# Altium PCB thymio2-main.PcbDoc (part 3 of 4)
Units mm, origin at the board's own origin, x right, y up, seen from the top; angles counter-clockwise.
Board outline 107 x 105.75 mm, 2 copper layers (Top Layer, Bottom Layer), stack 1.591 mm thick; 334 components, 247 nets, 987 pads, 487 vias.
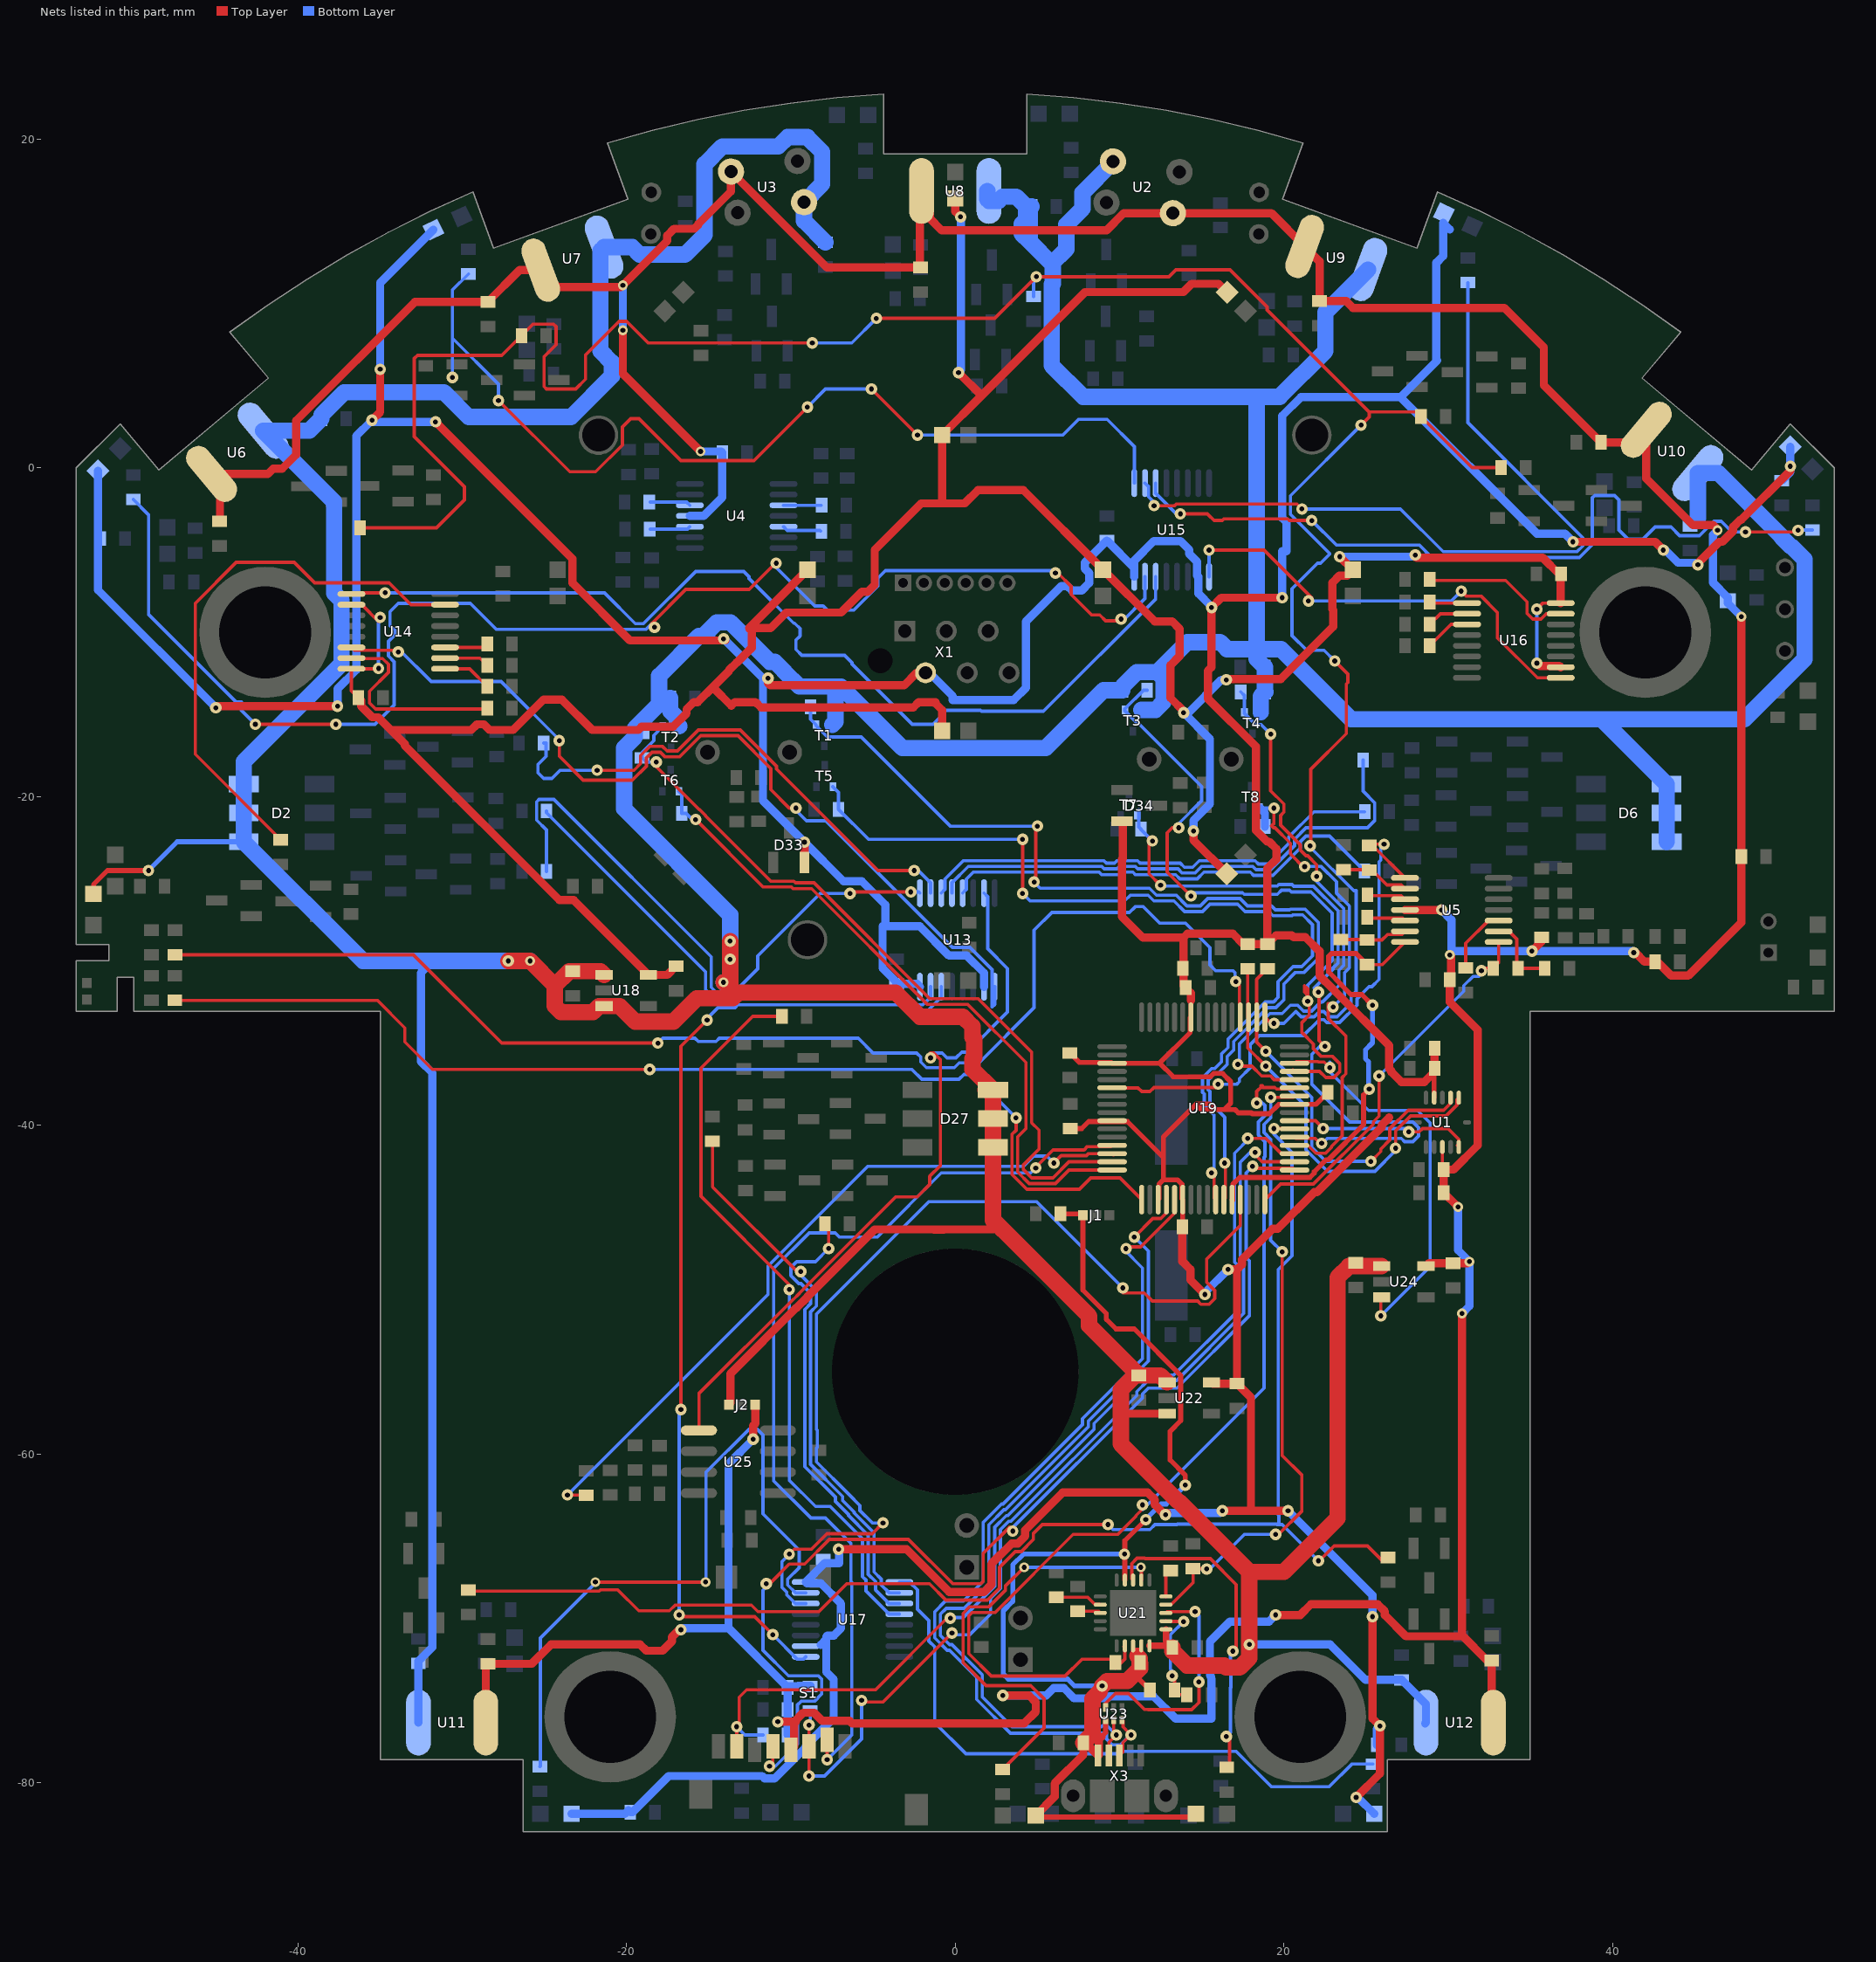
[diagram p3: the nets of this part, all layers, seen from the top]

## Via types
v1: diameter 0.7, hole 0.3, Top Layer to Bottom Layer, 458 vias
v2: diameter 0.6, hole 0.3, Top Layer to Bottom Layer, 25 vias
v3: diameter 0.66, hole 0.33, Top Layer to Bottom Layer, tented top, 4 vias

## Nets (pads, with @x,y where several pads share a name; then routed paths per layer and width w, separated by ;. In a path a pad name is that pad's centre, name@x,y a point inside that pad or via, vN(x,y) a via of type N, cw(c..) or ccw(c..) an arc to the next point about the centre after c; other vN are vias at no path point) (continued)
NetR11_1: R11.1 U5.1 U19.22 | length 32.5
  Top Layer w0.2: U19.22@9.55,-37.725 11.126,-37.725 11.351,-37.95 11.849,-37.95 12.099,-37.7 v1@16,-37.7 ; R11.1@25.2,-22.975 25.275,-22.9 v1(26.1,-22.9) ; R11.1@25.4,-22.975 U5.1@27.375,-24.95
  Bottom Layer w0.2: v1(16,-37.5) 17.15,-37.5 17.3,-37.35 17.3,-37.159 17.95,-36.509 17.95,-35.893 17.95,-35.106 18.506,-34.55 21.191,-34.55 22.166,-33.574 22.431,-33.574 22.606,-33.75 23.393,-33.75 24.45,-32.693 24.45,-32.307 25.182,-31.575 25.356,-31.575 25.8,-31.131 25.8,-23.971 25.9,-23.871 25.9,-23.1 v1(26.1,-22.9)
NetR11_2: R11.2 R25.2 U5.2 | length 4.2
  Top Layer w0.2: R25.2@23.625,-24.45 25.175,-24.45 R11.2@25.2,-24.475 25.375,-24.475 26.275,-25.375 27.15,-25.375 U5.2@27.375,-25.6
NetR17_2: R17.2 U4.3 | length 2.5
  Bottom Layer w0.2: R17.2@-18.55,-3.725 -16.301,-3.725 U4.3@-16.151,-3.575
NetR18_2: R18.2 U4.5 | length 2.5
  Bottom Layer w0.2: R18.2@-18.575,-2.075 -16.351,-2.075 U4.5@-16.151,-2.275
NetR19_2: R19.2 U4.10 | length 2.3
  Bottom Layer w0.2: U4.10@-10.451,-2.275 R19.2@-8.175,-2.275
NetR20_2: R20.2 U4.12 | length 2.4
  Bottom Layer w0.2: U4.12@-10.451,-3.575 -10.226,-3.8 -8.25,-3.8 R20.2@-8.2,-3.85
NetR26_2: R26.2 U5.3 | length 2.4
  Top Layer w0.2: R26.2@25.1,-25.975 25.15,-26.025 27.15,-26.025 U5.3@27.375,-26.25
NetR32_1: R32.1 R33.1 R34.1 R35.1 R41.2 U19.1 | length 151.3
  Top Layer w0.2: R41.2@-36.225,-3.65 -31.576,-3.65 -29.875,-1.949 -29.875,-1.146 -32.925,1.904 -32.925,6.654 -32.729,6.85 -27.6,6.85 R32.1@-26.4,8.05 -25.7,8.75 -24.446,8.75 -24.3,8.604 -24.3,7.496 -25.025,6.771 -25.025,4.946 -24.879,4.8 -23.1,4.8 -22.5,5.4 -22.5,6.878 -20.458,8.92 -20.002,8.92 -18.682,7.6 v1(-8.7,7.6) ; v1(-4.8,9.1) 2.4,9.1 v1(4.935,11.635) 13.007,11.635 13.427,12.055 16.725,12.055 18.985,9.795 18.985,9.615 25.2,3.4 ; U19.1@18.85,-33.425 19.225,-33.8 v1(19.4,-33.8) ; v1(21.6,-23) 21.6,-23.2 21.634,-23.234 21.634,-18.342 23.8,-16.176 23.8,-13.149 23.9,-13.049 23.9,-12.551 v1(23.1,-11.751) ; v1(24.7,2.6) 25.2,3.1 25.2,3.4 ; R35.1@33.225,0.025 31.45,0.025 R34.1@28.35,3.125 28.075,3.4 25.2,3.4
  Bottom Layer w0.2: v1(-8.7,7.6) -6.3,7.6 v1(-4.8,9.1) ; R33.1@4.775,10.425 4.775,11.475 v1(4.935,11.635) ; v1(19.4,-33.8) 20,-33.8 20.719,-33.081 20.735,-33.081 21.056,-33.402 21.843,-33.402 22.165,-33.081 22.432,-33.081 22.751,-33.4 23.248,-33.4 24.1,-32.548 24.1,-32.162 24.4,-31.862 24.4,-25.731 24.253,-25.731 21.6,-23.078 v1(21.6,-23) ; v1(23.1,-11.751) 22.449,-11.1 21.4,-11.1 20.503,-10.203 20.503,-7.349 22.051,-5.8 22.232,-5.8 22.8,-5.232 20.4,-2.832 20.4,-1.7 v1(24.7,2.6)
NetR42_1: R42.1 U5.7 U19.44 | length 28.3
  Top Layer w0.2: R42.1@25.075,-30.225 26,-30.225 U5.7@27.375,-28.85
  Top Layer w0.3: U19.44@16.9,-44.575 U19.44@16.85,-44.525 16.9,-44.475 16.9,-43.589 17.314,-43.175 21.586,-43.175 21.85,-42.911 21.85,-42.824 22.574,-42.1 22.714,-42.1 24.85,-39.964 24.85,-38.15 v1(25.2,-37.8) ; R42.1@25.075,-30.225 24.4,-29.55 22.901,-29.55 22.725,-29.726 22.725,-30.674 23.5,-31.449 23.5,-31.461 24.088,-32.05 24.75,-32.05 v1(25.4,-32.7)
  Bottom Layer w0.3: v1(25.2,-37.8) 25.15,-37.75 25.15,-36.141 24.964,-35.955 24.964,-35.417 25.4,-34.981 v1(25.4,-32.7)
NetR42_2: R42.2 R48.2 U5.6 | length 4.1
  Top Layer w0.2: R48.2@23.475,-28.7 25.05,-28.7 R42.2@25.075,-28.725 25.975,-28.725 26.3,-28.4 27.175,-28.4 U5.6@27.375,-28.2
NetR43_1: R43.1 U5.8 U19.48 | length 23.3
  Top Layer w0.2: U19.48@18.85,-44.525 19.8,-43.575 21.805,-43.575 25.45,-39.93 25.45,-39.792 25.8,-39.442 v1(25.8,-37) ; v1(32.025,-30.6) 32.175,-30.45 R43.1@32.75,-30.45 33.075,-30.125 U5.8@33.075,-28.85
  Bottom Layer w0.2: v1(25.8,-37) 30.95,-31.85 30.95,-31.506 31.506,-30.95 31.85,-30.95 32.025,-30.775 v1(32.025,-30.6)
NetR43_2: R43.2 R49.2 U5.9 | length 4.7
  Top Layer w0.2: U5.9@33.075,-28.2 33.701,-28.2 34.175,-28.674 34.175,-30.375 R43.2@34.25,-30.45 R49.2@35.875,-30.45
NetR46_2: R46.2 U5.5 | length 2.4
  Top Layer w0.2: R46.2@25.075,-27.35 25.125,-27.4 27.225,-27.4 U5.5@27.375,-27.55
NetR47_2: R47.2 U5.10 | length 4.1
  Top Layer w0.2: R47.2@31.075,-30.425 31.075,-28.924 32.449,-27.55 U5.10@33.075,-27.55
NetR52_1: R52.1 R53.1 U19.54 | length 89
  Top Layer w0.2: R52.1@-29.625,-68.275 -29.55,-68.35 -21.672,-68.35 -21.597,-68.275 -20.538,-68.275 -19.263,-69.55 -17.399,-69.55 -17.049,-69.2 -12.405,-69.2 -12.005,-69.6 -8.3,-69.6 -6.65,-67.95 ; -6.6,-67.9 -1.568,-67.9 -0.568,-68.9 1.968,-68.9 2.7,-68.168 2.7,-66.9 3.65,-65.95 4.018,-65.95 4.75,-65.218 4.75,-64.85 5.3,-64.3 v1(9.3,-64.3) ; v1(19.4,-40.2) 20.625,-40.2 U19.54@20.65,-40.225 ; v1(22.1,-66.5) 22.161,-66.5 23.061,-65.6 25.1,-65.6 26,-66.5 26.15,-66.5 R53.1@26.35,-66.3
  Bottom Layer w0.2: v1(9.3,-64.3) 9.6,-64.6 11.849,-64.6 12.149,-64.3 13.502,-64.3 13.526,-64.275 19.575,-64.275 19.6,-64.3 ; v1(19.4,-40.2) 19.4,-40.553 20.5,-41.654 20.5,-47.949 19.661,-48.788 19.661,-63.709 19.7,-63.749 19.7,-64.2 19.6,-64.3 ; v1(22.1,-66.5) 19.9,-64.3 19.6,-64.3
NetR56_1: R56.1 U14.15 | length 12.6
  Top Layer w0.2: U14.15@-36.75,-11.575 -36.725,-11.6 -34.851,-11.6 -34.5,-11.951 -34.5,-12.449 -35.65,-13.599 -35.65,-14.304 -35.279,-14.675 -28.525,-14.675 R56.1@-28.475,-14.625
NetR57_1: R57.1 U13.15 | length 30.2
  Bottom Layer w0.2: R57.1@-24.875,-20.875 -24.875,-20.986 -15.2,-30.661 -15.2,-31.756 -14.456,-32.5 -13.544,-32.5 -13.094,-32.05 -3.36,-32.05 -2.735,-32.675 -1.974,-32.675 -1.5,-32.201 U13.15@-1.5,-31.575
NetR58_1: R58.1 U14.1 | length 3
  Top Layer w0.2: U14.1@-31.05,-12.225 -29.55,-12.225 R58.1@-28.475,-13.3
NetR59_1: R59.1 U13.1 | length 37
  Top Layer w0.2: v1(-6.4,-25.9) -6.3,-25.8 v1(-2.7,-25.8)
  Bottom Layer w0.2: R59.1@-24.875,-24.55 -24.875,-22.029 -25.475,-21.429 -25.475,-20.321 -25.329,-20.175 -24.421,-20.175 -14.85,-29.746 -14.85,-31.611 -14.311,-32.15 -13.689,-32.15 -12.023,-30.484 -12.023,-29.694 -8.229,-25.9 v1(-6.4,-25.9) ; v1(-2.7,-25.8) -2.225,-25.8 U13.1@-2.15,-25.875
NetR60_1: R60.1 U14.2 | length 2.8
  Top Layer w0.2: U14.2@-31.05,-11.575 -28.925,-11.575 R60.1@-28.475,-12.025
NetR61_1: R61.1 U13.2 | length 32.5
  Top Layer w0.2: v1(-21.8,-18.4) -19.549,-18.4 -19.15,-18.001 -19.15,-17.506 -18.593,-16.95 -17.806,-16.95 -17.531,-17.226 -16.91,-17.226 -15.634,-15.95 -13.076,-15.95 -10.875,-18.151 -10.875,-18.325 -4.7,-24.5 v1(-2.5,-24.5)
  Bottom Layer w0.2: R61.1@-25.05,-16.75 -24.899,-16.75 -24.899,-17.55 -25.4,-18.051 -25.4,-18.549 -25.049,-18.9 -24.551,-18.9 -24.051,-18.4 v1(-21.8,-18.4) ; v1(-2.5,-24.5) -2.249,-24.5 -1.5,-25.249 U13.2@-1.5,-25.875
NetR62_1: R62.1 U14.3 | length 2.7
  Top Layer w0.2: U14.3@-31.05,-10.925 -28.675,-10.925 R62.1@-28.475,-10.725
NetR63_1: R63.1 U13.3 | length 29
  Bottom Layer w0.2: U13.3@-0.85,-25.875 -0.625,-25.65 -0.625,-25.024 0.499,-23.9 9.051,-23.9 9.201,-24.05 9.699,-24.05 9.849,-23.9 11.105,-23.9 11.255,-24.05 13.701,-24.05 13.951,-24.3 14.449,-24.3 14.849,-23.9 18.251,-23.9 18.451,-24.1 19.048,-24.1 20.3,-22.848 20.3,-22.461 21.836,-20.925 R63.1@24.925,-20.925
NetR64_1: R64.1 U13.4 | length 32.8
  Bottom Layer w0.2: U13.4@-0.2,-25.875 -0.2,-25.249 0.799,-24.25 8.906,-24.25 9.056,-24.4 9.843,-24.4 9.994,-24.25 10.96,-24.25 11.11,-24.4 13.556,-24.4 13.807,-24.65 14.593,-24.65 14.994,-24.25 18.106,-24.25 18.306,-24.45 19.193,-24.45 20.65,-22.993 20.65,-22.606 21.353,-21.904 25.1,-21.904 25.525,-21.479 25.525,-20.371 24.825,-19.671 R64.1@24.825,-17.775
NetR65_1: R65.1 U13.5 | length 28
  Bottom Layer w0.2: U13.5@0.45,-25.875 0.675,-25.65 0.675,-25.024 1.099,-24.6 8.762,-24.6 8.912,-24.75 9.988,-24.75 10.138,-24.6 10.815,-24.6 10.965,-24.75 13.412,-24.75 13.662,-25 14.738,-25 15.138,-24.6 17.962,-24.6 18.161,-24.8 19.338,-24.8 21,-23.138 21,-22.751 21.351,-22.4 22.775,-22.4 R65.1@24.9,-24.525
NetR74_1: R74.1 U15.15 | length 88
  Top Layer w0.2: v1(-42.6,-15.6) v1(-37.7,-15.6) ; v1(-18.3,-9.7) -18.3,-9.65 -18.475,-9.475 -16.399,-7.399 -12.542,-7.399 -10.943,-5.8 v1(-10.9,-5.8) ; v1(6.1,-6.4) 6.1,-6.396 6.246,-6.25 6.246,-6.4 7.05,-7.204 7.05,-7.699 8.301,-8.95 8.796,-8.95 9.146,-9.3 10.2,-9.3 v1(10.1,-9.2)
  Bottom Layer w0.2: R74.1@-50.025,-1.925 -49.1,-2.85 -49.1,-8.91 -43.76,-14.25 -43.45,-14.25 -43.45,-14.75 v1(-42.6,-15.6) ; v1(-37.7,-15.6) -35.324,-15.6 -34.15,-14.426 -34.15,-11.798 -34.5,-11.449 -34.5,-10.551 -34.1,-10.151 -34.1,-9.893 -34.4,-9.593 -34.4,-8.756 -33.894,-8.25 -29.512,-8.25 -27.937,-9.825 -18.825,-9.825 -18.475,-9.475 -18.3,-9.65 v1(-18.3,-9.7) ; v1(-10.9,-5.8) -10.943,-5.8 -11.047,-5.903 -8.55,-8.4 -8.043,-8.4 -7.793,-8.65 -6.158,-8.65 -4.701,-7.193 -4.701,-6.699 -4.253,-6.25 6.246,-6.25 6.1,-6.396 v1(6.1,-6.4) ; v1(10.1,-9.2) 10.2,-9.3 11.55,-7.95 U15.15@11.55,-6.625
NetR75_1: R75.1 U15.1 | length 61.5
  Top Layer w0.2: v1(-27.8,4.1) -23.461,-0.239 -21.889,-0.239 -20.261,1.389 -20.261,2.487 -19.749,3 -19.251,3 -16.701,0.45 -12.25,0.45 v1(-9,3.7) ; v1(-5.1,4.8) v1(-2.3,2)
  Bottom Layer w0.2: v1(-30.6,5.5) -30.6,7.9 ; R75.1@-29.625,11.8 -30.6,10.825 -30.6,7.9 ; v1(-27.8,4.1) -27.8,5.1 -30.6,7.9 ; v1(-9,3.7) -7.9,4.8 v1(-5.1,4.8) ; v1(-2.3,2) 6.557,2 7.507,2.95 9.25,2.95 10.9,1.3 U15.1@10.9,-0.925
NetR76_1: R76.1 U15.2 | length 48
  Top Layer w0.2: v1(12.1,-2.3) 13.351,-2.3 13.451,-2.2 20.8,-2.2 v1(21.1,-2.5)
  Bottom Layer w0.2: U15.2@11.55,-0.925 11.775,-1.15 11.775,-1.776 12.1,-2.101 v1(12.1,-2.3) ; v1(21.1,-2.5) 27.1,-2.5 29.7,-5.1 37.849,-5.1 38.2,-4.749 38.2,-4.251 31.2,2.749 R76.1@31.2,11.275
NetR77_1: R77.1 U15.3 | length 49
  Top Layer w0.2: v1(13.7,-2.8) 15.351,-2.8 15.4,-2.848 15.751,-3.2 16.248,-3.2 16.348,-3.1 20.243,-3.1 20.343,-3.2 v1(21.7,-3.2) ; v1(48.1,-3.9) 51.3,-3.9 v1(51.3,-3.8)
  Bottom Layer w0.2: U15.3@12.2,-0.925 12.2,-1.551 13.449,-2.8 v1(13.7,-2.8) ; v1(21.7,-3.2) 23.2,-4.7 28.248,-4.7 28.998,-5.45 37.994,-5.45 38.775,-4.669 38.775,-1.821 38.921,-1.675 40.129,-1.675 40.4,-1.946 40.4,-3.779 40.959,-4.337 41.857,-4.337 42.595,-3.6 43.568,-3.6 44.093,-4.125 45.297,-4.125 46.172,-3.25 46.628,-3.25 47.278,-3.9 v1(48.1,-3.9) ; v1(51.3,-3.8) 51.325,-3.775 R77.1@52.175,-3.775
NetR78_1: R78.1 U16.15 | length 9.5
  Top Layer w0.2: R78.1@28.875,-6.775 28.95,-6.85 33.499,-6.85 34.8,-8.151 34.8,-8.849 35.151,-9.2 35.649,-9.2 35.974,-8.875 U16.15@36.85,-8.875
NetR79_1: R79.1 U16.1 | length 2.3
  Top Layer w0.2: R79.1@28.875,-8.175 28.925,-8.225 U16.1@31.15,-8.225
NetR80_1: R80.1 U16.2 | length 2.5
  Top Layer w0.2: R80.1@28.875,-9.525 29.525,-8.875 U16.2@31.15,-8.875
NetR81_1: R81.1 U16.3 | length 2.8
  Top Layer w0.2: R81.1@28.875,-10.825 30.175,-9.525 U16.3@31.15,-9.525
NetR90_1: R90.1 U17.15 | length 42.3
  Top Layer w0.2: v2(-21.9,-67.8) v2(-15.2,-67.8)
  Bottom Layer w0.2: R90.1@-25.275,-79.025 -25.25,-79 -25.25,-71.201 v2@-21.874,-67.826 ; v2(-15.2,-67.8) -15.174,-67.774 -15.174,-61.126 -12.549,-58.5 -12.051,-58.5 -11.7,-58.851 -11.7,-63.651 -9.5,-65.851 -9.5,-66.924 -10.2,-67.624 -10.2,-67.976 -9.726,-68.45 U17.15@-9.1,-68.45
NetR91_1: R91.1 U17.1 | length 38.8
  Bottom Layer w0.2: U17.1@-3.4,-67.8 -2.774,-67.8 -2.3,-68.274 -2.3,-69.449 -1.6,-70.149 -1.6,-71.389 -1.25,-71.739 -1.25,-76.355 0.645,-78.25 9.943,-78.25 10.093,-78.1 17.09,-78.1 19.24,-80.25 22.76,-80.25 24.135,-78.875 R91.1@25.425,-78.875
NetR92_1: R92.1 U17.2 | length 33.2
  Top Layer w0.2: R92.1@-14.775,-40.975 -14.775,-43.755 -9.5,-49.03 -9.4,-48.93 v1(-9.4,-48.9)
  Bottom Layer w0.2: v1(-9.4,-48.9) -9.4,-48.93 -9.5,-49.03 -8.45,-50.08 -8.45,-51.005 -8.8,-51.355 -8.8,-60.633 -6.85,-62.583 -6.85,-62.845 -6.15,-63.545 -6.15,-63.593 -4.943,-64.8 -4.943,-67.18 -4.5,-67.624 -4.5,-67.976 -4.026,-68.45 U17.2@-3.4,-68.45
NetR93_1: R93.1 U17.3 | length 28.3
  Top Layer w0.2: R93.1@-7.925,-46 -7.7,-46.225 v1(-7.7,-47.5)
  Bottom Layer w0.2: v1(-7.7,-47.5) -8.5,-48.3 -9.649,-48.3 -10,-48.651 -10,-49.148 -9.518,-49.63 -9.395,-49.63 -8.8,-50.225 -8.8,-50.86 -9.15,-51.21 -9.15,-60.778 -7.299,-62.63 -7.299,-62.891 -6.5,-63.69 -6.5,-63.738 -5.293,-64.945 -5.293,-67.325 -4.85,-67.769 -4.85,-68.276 -4.026,-69.1 U17.3@-3.4,-69.1
NetR94_1: R94.1 U17.4 | length 45.3
  Top Layer w0.2: R94.1@-10.55,-33.375 -12.329,-33.375 -15.475,-36.521 -15.475,-44.325 -10.1,-49.7 v1(-10.1,-50)
  Bottom Layer w0.2: v1(-10.1,-50) -10.1,-61.597 -8.497,-63.2 -7.607,-63.2 -5.643,-65.163 -5.643,-67.47 -5.438,-67.675 -5.438,-68.338 -4.026,-69.75 U17.4@-3.4,-69.75
NetR102_2: R102.2 U19.33 | length 67.6
  Top Layer w0.2: R102.2@-47.5,-32.4 -35.176,-32.4 -33.5,-34.076 -33.5,-34.924 -31.824,-36.6 v1(-18.6,-36.6) ; v1(3.7,-39.551) 3.7,-40.305 3.45,-40.555 3.45,-42.988 4.362,-43.9 7.554,-43.9 8.254,-43.2 10.025,-43.2 U19.33@11.35,-44.525
  Bottom Layer w0.2: v1(-18.6,-36.6) -2.638,-36.6 -2.038,-37.2 0.233,-37.2 0.532,-36.901 1.05,-36.901 v1(3.7,-39.551)
NetR103_1: R103.1 U1.7 U19.2 | length 23.6
  Top Layer w0.2: v1(18.9,-35.5) 18.35,-34.95 U19.2@18.35,-33.425 18.35,-31.125 R103.1@19,-30.475 ; v1(25.3,-42.2) 25.9,-41.6 25.9,-41.451 26.45,-40.901 26.45,-40.206 27.571,-39.085 29.727,-39.085 30.15,-38.662 U1.7@30.15,-38.325
  Bottom Layer w0.2: v1(18.9,-35.5) 21.7,-38.3 21.7,-40.851 21.7,-41.348 22.552,-42.2 v1(25.3,-42.2)
NetR104_1: R104.1 U1.6 U19.3 | length 25.1
  Top Layer w0.2: R104.1@17.8,-30.475 17.8,-33.375 U19.3@17.85,-33.425 17.8,-33.475 17.8,-35.3 v1(18.9,-36.4) ; v1(26.8,-41.4) 26.8,-40.351 27.716,-39.435 29.877,-39.435 30.54,-38.772 30.54,-38.435 U1.6@30.65,-38.325
  Bottom Layer w0.2: v1(18.9,-36.4) 21.35,-38.85 21.35,-40.706 21.35,-41.493 22.657,-42.8 25.549,-42.8 26.8,-41.549 v1(26.8,-41.4)
NetR106_2: R106.2 U21.7 | length 27.1
  Top Layer w0.2: R106.2@2.9,-79.2 R106.2@2.875,-79.2 5.4,-76.675 5.4,-74.903 4.597,-74.1 1.875,-74.1 0.475,-72.7 0.475,-69.701 0.876,-69.3 2.063,-69.3 3.05,-68.313 3.05,-68.05 v2(4.2,-66.9) ; v2(11.3,-66.9) 11.325,-66.925 U21.7@11.325,-67.675
  Bottom Layer w0.2: v2(4.2,-66.9) v2(11.3,-66.9)
NetR107_2: R107.2 U21.8 | length 19.9
  Top Layer w0.2: U21.8@10.825,-67.675 10.75,-67.6 10.75,-66.672 11.072,-66.35 11.528,-66.35 11.553,-66.375 15.524,-66.375 17.1,-67.951 17.1,-71.8 v1(16.9,-72) ; v1(16.5,-77.2) 16.7,-77.2 R107.2@16.7,-78.9 ; R107.2@16.525,-79.075 R107.2@16.7,-78.9 ; R107.2@16.75,-78.85 R107.2@16.7,-78.9
  Bottom Layer w0.2: v1(16.5,-77.2) 16.75,-76.95 16.75,-74.24 16.782,-74.208 16.782,-73.255 16.75,-73.224 16.75,-72.15 v1(16.9,-72)
NetR108_2: R108.2 U21.13 | length 1.4
  Top Layer w0.2: R108.2@7.45,-69.575 8.725,-69.575 U21.13@8.825,-69.675
NetR109_2: R109.2 U21.12 | length 2.9
  Top Layer w0.2: R109.2@6.15,-68.725 8.07,-68.725 8.495,-69.15 8.8,-69.15 U21.12@8.825,-69.175
NetR110_2: R110.2 U21.5 | length 1.7
  Top Layer w0.2: U21.5@12.825,-68.675 12.825,-67.375 R110.2@13.1,-67.1
NetR111_1: R111.1 T2.1 U19.31 | length 47.5
  Top Layer w0.2: v1(-18.2,-17.9) -18.2,-18.179 -15.579,-20.8 -15.551,-20.8 -15.2,-21.151 -15.2,-21.179 -11.229,-25.15 -9.824,-25.15 -9.724,-25.25 -8.599,-25.25 -1.549,-32.3 1.4,-32.3 4.65,-35.55 4.65,-39.85 5.1,-40.3 5.1,-41.453 4.153,-42.4 4.15,-42.4 4.15,-42.698 4.651,-43.2 5.949,-43.2 6.924,-42.225 U19.31@9.55,-42.225
  Bottom Layer w0.2: v1(-18.2,-17.9) -18.8,-17.9 R111.1@-19.05,-17.65 -19.05,-17.304 -18.35,-16.604 -18.35,-16.275 T2.1@-17.8,-15.725
NetR112_1: R112.1 T4.1 U19.60 | length 34.2
  Top Layer w0.2: v1(17.2,-36.3) 17.3,-36.4 18.051,-36.4 18.651,-37 19.189,-37 19.414,-37.225 U19.60@20.65,-37.225 ; v1(19.2,-16.2) 19.2,-19.651 20,-20.451 20,-20.949 19.8,-21.149 19.8,-21.742 21,-22.942 21,-23.248 21.351,-23.6 ; 21.451,-23.6 22,-24.149 v1@22,-24.748
  Bottom Layer w0.2: v1(17.2,-36.3) v1@17.3,-36.4 ; v1(17.2,-36.3) v1@17.3,-36.4 ; R112.1@17.375,-13.625 17.6,-13.85 T4.1@17.6,-14.875 17.6,-14.936 18.289,-15.625 18.625,-15.625 v1(19.2,-16.2) ; v1@21.893,-24.856 v1(22,-24.856) 22,-25.163 23.644,-26.807 23.644,-30.274 23.35,-30.568 23.35,-31.498 22.348,-32.5 22.251,-32.5 21.698,-33.052 21.201,-33.052 20.849,-32.7 20.4,-32.7 19.9,-33.2 19.151,-33.2 17.3,-35.051 v1@17.3,-36.4
NetR113_1: R113.1 T1.1 U19.43 | length 60.3
  Top Layer w0.2: v1(4.8,-25.2) 4.9,-25.1 4.9,-21.9 v1(5,-21.8) ; U19.43@16.35,-44.525 16.45,-44.425 16.45,-42.35 v1(16.4,-42.3)
  Bottom Layer w0.2: R113.1@-8.8,-14.55 -8.8,-15.3 T1.1@-8.475,-15.625 -8.475,-15.686 -7.786,-16.375 -5.725,-16.375 -0.3,-21.8 v1(5,-21.8) ; v1(4.8,-25.2) 5.176,-25.576 11.827,-25.576 12.251,-26 12.749,-26 13.451,-26 14.101,-26.65 14.911,-26.65 15.361,-26.2 17.338,-26.2 17.788,-26.65 19.24,-26.65 19.49,-26.9 20.348,-26.9 20.398,-26.85 21.293,-26.85 22.1,-27.656 22.1,-29.838 21.238,-30.7 20.713,-30.7 20,-31.413 20,-32.368 19.518,-32.85 19.006,-32.85 16.95,-34.906 16.95,-35.418 16.55,-35.818 16.55,-36.293 15.943,-36.9 15.751,-36.9 15.4,-37.251 15.4,-37.848 15.5,-37.948 15.5,-38.62 15.866,-38.986 16.4,-39.52 v1(16.4,-42.3)
NetR114_1: R114.1 T3.1 U19.61 | length 43.4
  Top Layer w0.2: v1(13.6,-21.9) 13.2,-21.9 12.9,-22.2 12.9,-24.6 v1(14.35,-26.05) ; U19.61@20.55,-36.625 U19.61@20.65,-36.725 22.177,-36.725 22.551,-37.1 23.048,-37.1 23.4,-36.748 23.4,-36.251 22.948,-35.8 22.251,-35.8 21.8,-35.349 21.8,-35.059 21.1,-34.359 21.1,-33.751 21.55,-33.301 21.55,-32.199 21.45,-32.098 ; v1(21.45,-32.452) 21.45,-32.098 ; 21.45,-32.098 21.45,-31.694 21.256,-31.5 21.256,-31.905 21.45,-32.098
  Bottom Layer w0.2: R114.1@11.675,-13.525 11.464,-13.525 10.325,-14.664 T3.1@10.325,-14.725 10.325,-14.786 11.014,-15.475 11.084,-15.475 15,-19.391 15,-20.249 13.6,-21.649 v1(13.6,-21.9) ; v1(14.35,-26.05) 14.55,-25.85 17.483,-25.85 17.583,-25.95 19.601,-25.95 19.851,-25.7 20.348,-25.7 20.454,-25.806 21.653,-25.806 22.944,-27.097 22.944,-29.984 21.45,-31.478 v1(21.45,-32.452)
NetR119_1: R119.1 T5.1 U19.42 | length 56.9
  Top Layer w0.2: v1(4.1,-25.9) v1(4.1,-22.6) ; v1(15.6,-42.9) 15.75,-42.75 15.75,-44.425 U19.42@15.85,-44.525
  Bottom Layer w0.2: T5.1@-7.45,-19.4 -7.1,-19.75 R119.1@-7.1,-20.775 -5.275,-22.6 v1(4.1,-22.6) ; v1(4.1,-25.9) 4.55,-26.35 10.312,-26.35 10.662,-26 11.738,-26 12.088,-26.35 13.306,-26.35 13.956,-27 15.056,-27 15.506,-26.55 17.193,-26.55 17.644,-27 19.095,-27 19.345,-27.25 20.493,-27.25 20.543,-27.2 21.148,-27.2 21.75,-27.801 21.75,-29.693 21.093,-30.35 20.568,-30.35 19.65,-31.268 19.65,-32.223 19.373,-32.5 18.861,-32.5 16.6,-34.761 16.6,-35.273 16.2,-35.673 16.2,-36.148 15.799,-36.55 15.606,-36.55 15.05,-37.106 15.05,-37.993 15.15,-38.093 15.15,-38.765 15.721,-39.336 15.75,-39.365 15.75,-42.75 v1(15.6,-42.9)
NetR120_1: R120.1 T7.1 U19.53 | length 45.3
  Top Layer w0.2: v1(12,-22.7) 11.8,-22.5 11.8,-24.7 v1(12.5,-25.4) ; U19.53@20.65,-40.725 20.725,-40.8 21.9,-40.8 22.2,-41.1 v1(22.3,-41.1) ; v1(22.1,-31.9) 22.1,-31.888 22.15,-31.938 22.15,-34.85 v1(22.5,-35.2)
  Bottom Layer w0.2: 11.175,-20.8 11.175,-21.85 R120.1@11.3,-21.975 11.3,-22 v1(12,-22.7) ; v1(12.5,-25.4) 12.55,-25.45 19.606,-25.45 19.706,-25.35 20.493,-25.35 20.599,-25.456 21.798,-25.456 23.294,-26.952 23.294,-30.129 23,-30.423 23,-30.5 21.856,-31.644 22.1,-31.888 v1(22.1,-31.9) ; v1(22.3,-41.1) 22.349,-41.1 22.649,-40.8 27.151,-40.8 27.351,-41 27.848,-41 28.2,-40.648 28.2,-40.151 27.848,-39.8 24.006,-39.8 21.7,-37.494 21.7,-35.7 22.2,-35.2 v1(22.5,-35.2)
NetR121_1: R121.1 T6.1 U19.32 | length 41.9
  Top Layer w0.2: v1(-15.8,-21.4) -11.7,-25.5 -9.968,-25.5 -9.868,-25.6 -8.743,-25.6 -1.693,-32.65 0.773,-32.65 4.3,-36.177 4.3,-40.2 3.8,-40.7 3.8,-42.843 4.506,-43.55 6.094,-43.55 6.919,-42.725 U19.32@9.55,-42.725
  Bottom Layer w0.2: T6.1@-16.825,-19.675 -16.65,-19.85 R121.1@-16.65,-21.025 -16.375,-21.025 -16,-21.4 v1(-15.8,-21.4)
NetR122_1: R122.1 T8.1 U19.52 | length 30.1
  Top Layer w0.2: v1(19.4,-20.7) 19.4,-21.629 19.25,-21.779 19.371,-21.9 19.463,-21.9 20.4,-22.837 20.4,-23.5 21.264,-24.364 v1(21.264,-24.262) ; U19.52@20.65,-41.225 21.466,-41.225 21.941,-41.7 22.548,-41.7 22.9,-41.348 22.9,-41.295 23.552,-40.643 23.552,-37.092 23.775,-36.868 23.775,-34.575 22.7,-33.5 22.7,-32.6 22.8,-32.6 v1(23,-32.8)
  Bottom Layer w0.2: T8.1@18.525,-20.675 18.55,-20.7 v1(19.4,-20.7) ; v1(21.264,-24.262) 21.27,-24.256 22.28,-24.256 23.208,-25.183 23.208,-25.876 23.994,-26.662 23.994,-30.419 23.7,-30.713 23.7,-32.1 v1(23,-32.8)
  Bottom Layer w0.5: T8.1@18.55,-20.7 18.85,-21 R122.1@18.85,-21.825
NetR123_1: R123.1 S1.7 U19.51 | length 61.5
  Top Layer w0.2: S1.7@-13.3,-77.8 v1(-13.3,-76.6) -13.15,-76.45 -13.15,-74.801 -12.699,-74.35 -4.85,-74.35 -0.5,-70 v1(-0.3,-70) ; v1(17.8,-40.8) 18.909,-40.8 19.834,-41.725 U19.51@20.65,-41.725
  Bottom Layer w0.2: v1(-13.3,-76.6) -12.8,-77.1 R123.1@-11.7,-77.1 ; v1(-0.3,-70) -0.256,-69.956 0.487,-69.956 2.4,-68.043 2.4,-64.456 3.106,-63.75 3.2,-63.75 8.45,-58.5 8.45,-58.15 11.4,-55.2 13.304,-55.2 17.2,-51.304 17.2,-48.528 17,-48.328 17,-41.7 17.9,-40.8 v1(17.8,-40.8)
NetR124_1: R124.1 S1.3 U19.50 | length 60.1
  Top Layer w0.2: v1(-8.9,-79.6) S1.3@-8.9,-77.8 v1(-8.9,-76.5) ; v1(-5.7,-75) -5.7,-75.1 -4.4,-75.1 v1(-0.2,-70.9) ; v1(18.252,-41.65) v1@18.099,-41.65 ; U19.50@20.65,-42.225 18.674,-42.225 v1@18.099,-41.65 ; v1@18.099,-41.65 18.049,-41.6 18,-41.6 18.05,-41.65 v1@18.099,-41.65
  Bottom Layer w0.2: v1(-8.9,-79.6) -7.952,-79.6 -5.7,-77.348 v1(-5.7,-75) ; v1(-8.9,-76.5) -8.825,-76.425 R124.1@-8.825,-75.65 ; v1(-0.2,-70.9) -0.1,-71 0.895,-71 2.15,-69.745 2.15,-68.788 2.75,-68.188 2.75,-64.601 3.251,-64.1 3.395,-64.1 11.05,-56.445 11.05,-56.207 11.706,-55.55 13.449,-55.55 17.55,-51.449 17.55,-48.383 17.35,-48.183 17.35,-42.25 18,-41.6 18.05,-41.65 v1(18.252,-41.65)
NetR131_1: R131.1 U19.30 | length 44.4
  Top Layer w0.2: v1(-23.6,-62.5) -22.475,-62.5 R131.1@-22.45,-62.525 ; v1(6,-42.3) 6.45,-41.85 7.988,-41.85 8.113,-41.725 U19.30@9.55,-41.725 U19.30@9.625,-41.8
  Bottom Layer w0.2: v1(-23.6,-62.5) -11.4,-50.3 -11.4,-48.566 -5.334,-42.5 4.151,-42.5 4.775,-41.877 5.577,-41.877 v1(6,-42.3)
NetR137_2: R137.2 U19.4 | length 79.9
  Top Layer w0.2: R137.2@-47.475,-29.625 -32.975,-29.625 -27.6,-35 v1(-18.1,-35) ; v1(17.075,-31.257) 17.3,-31.482 17.3,-33.375 U19.4@17.35,-33.425
  Bottom Layer w0.2: v1(-18.1,-35) -17.8,-34.7 -15.838,-34.7 -15.638,-34.9 -14.562,-34.9 -14.362,-34.7 -5.9,-34.7 -5,-35.6 -2.348,-35.6 -2.1,-35.848 -2.1,-36.148 -1.749,-36.5 -0.056,-36.5 0.242,-36.201 1.45,-36.201 4.8,-32.851 4.8,-28.127 5.877,-27.05 10.601,-27.05 10.951,-26.7 11.449,-26.7 12.449,-27.7 14.013,-27.7 15.5,-29.187 15.5,-30.248 15.851,-30.6 16.913,-30.6 17.025,-30.712 17.025,-31.207 v1(17.075,-31.257)
NetR138_2: R138.2 U19.58 U21.4 | length 39
  Top Layer w0.2: U21.4@12.825,-69.175 13.13,-69.175 14.475,-67.83 R138.2@14.475,-66.975 15.275,-66.975 v1(15.3,-67) ; v1(19.2,-38.3) 20.575,-38.3 U19.58@20.65,-38.225 ; v1(19.5,-64.9) 19.67,-64.9 21.1,-63.47 21.1,-61.3 19.9,-60.1 v1(19.9,-47.7)
  Bottom Layer w0.2: v1(15.3,-67) 15.4,-67.1 17.6,-64.9 v1(19.5,-64.9) ; v1(19.2,-38.3) 19.202,-38.302 19.202,-39.549 18.8,-39.951 18.8,-40.448 19.202,-40.851 19.202,-42.043 19.2,-42.046 19.2,-47 v1(19.9,-47.7)
NetR139_1: R139.1 U19.59 U21.17 | length 60
  Top Layer w0.2: R139.1@9.75,-73.05 10.325,-72.475 U21.17@10.325,-71.675 U21.17@10.275,-71.725 ; R139.1@9.75,-72.7 9.55,-72.5 7.7,-72.5 6.68,-73.52 2.191,-73.52 0.825,-72.154 0.825,-69.846 1.021,-69.65 2.425,-69.65 7.175,-64.9 9.9,-64.9 11,-63.8 11,-63.751 11.4,-63.351 v1(11.4,-63.1) ; v1(18.35,-38.652) 18.35,-37.948 18.649,-37.649 ; U19.59@20.625,-37.7 U19.59@20.65,-37.725 20.575,-37.8 19.549,-37.8 19.449,-37.7 18.7,-37.7 18.649,-37.649 ; 18.649,-37.649 18.698,-37.6 18.6,-37.6 18.649,-37.649
  Bottom Layer w0.2: v1(11.4,-63.1) 11.4,-63.4 18.8,-56 18.8,-41.951 18.852,-41.899 18.852,-40.996 18.45,-40.593 18.45,-39.806 18.852,-39.404 18.852,-38.801 18.6,-38.548 18.454,-38.548 v1(18.35,-38.652)
NetR140_1: R140.1 R141.2 U21.2 | length 6.5
  Top Layer w0.2: U21.2@12.825,-70.175 12.85,-70.2 v1(13.9,-70.2) ; v1(13.2,-73.5) 13.35,-73.65 R140.1@13.35,-74.375 ; R140.1@13.325,-74.6 13.375,-74.65 R141.2@14.1,-74.65
  Bottom Layer w0.2: v1(13.2,-73.5) 13.2,-73.2 13.1,-73.1 13.1,-71 v1(13.9,-70.2)
NetR142_2: R142.2 U14.7 | length 33.8
  Top Layer w0.2: R142.2@-41.05,-22.625 -46.25,-17.425 -46.25,-8.24 -43.76,-5.75 -40.24,-5.75 -38.99,-7 -34.451,-7 -33.126,-8.325 U14.7@-31.05,-8.325
NetS1_2: S1.2 U19.29 | length 57.7
  Top Layer w0.2: v1(-7.8,-78.6) S1.2@-7.8,-77.4 ; 5.15,-42.301 5.951,-41.5 7.843,-41.5 8.043,-41.3 9.475,-41.3 U19.29@9.55,-41.225
  Bottom Layer w0.2: v1(-7.8,-78.6) -6.3,-77.1 -6.3,-67.804 -6.343,-67.76 -6.343,-65.453 -7.897,-63.9 -8.787,-63.9 -11.05,-61.637 -11.05,-48.711 -8.889,-46.55 -7.307,-46.55 -7.056,-46.8 -4.749,-46.8 -0.849,-42.9 4.6,-42.9 v1(4.9,-42.6)
NetS1_5: S1.5 U19.49 | length 69.5
  Top Layer w0.2: v1(-11.5,-67.902) -11.5,-67.9 -11.3,-67.7 -11.2,-67.8 -10.1,-66.7 -9.164,-66.7 -7.663,-65.2 -2.854,-65.2 -0.154,-67.9 1.554,-67.9 1.7,-67.754 1.7,-66.051 3.3,-64.451 3.5,-64.651 v1(3.5,-64.7) ; v1(-11.3,-79) -11.1,-78.8 S1.5@-11.1,-77.8 ; v1(18.1,-42.5) 18.225,-42.625 20.55,-42.625 U19.49@20.65,-42.725
  Bottom Layer w0.2: v1(-11.5,-67.902) -11.5,-67.9 -11.3,-67.7 -11.3,-67.9 -11.7,-68.3 -11.7,-71.945 -10.145,-73.5 -8.321,-73.5 -8.125,-73.696 -8.125,-74.604 -8.571,-75.05 -9.379,-75.05 -9.6,-75.271 -9.6,-77.654 -10.946,-79 v1(-11.3,-79) ; v1(3.5,-64.7) 3.5,-64.49 11.4,-56.59 11.4,-56.351 11.751,-56 13.494,-56 17.9,-51.594 17.9,-48.238 17.7,-48.038 17.7,-42.9 v1(18.1,-42.5)
NetU1_5: U1.5 U19.55 | length 11.2
  Top Layer w0.2: U19.55@20.65,-39.725 21.925,-39.725 v1(22.4,-40.2) ; v1(27.6,-40.4) 28.237,-40.4 28.437,-40.2 29.998,-40.2 30.65,-40.852 U1.5@30.65,-41.325 U1.5@30.55,-41.225
  Bottom Layer w0.2: v1(22.4,-40.2) 27.4,-40.2 v1(27.6,-40.4)
NetU13_7: U13.7 U25.1 | length 44.6
  Top Layer w0.2: U25.1@-15.6,-58.57 -15.6,-56.329 -9.871,-50.6 -9.851,-50.6 -9.5,-50.249 -9.5,-50.229 -3.632,-44.361 -2.309,-44.361 -1.55,-43.601 -1.55,-43.107 -0.9,-42.456 -0.9,-36 -1.3,-35.6 -1.5,-35.6 v1(-1.5,-35.9)
  Bottom Layer w0.2: v1(-1.5,-35.9) -1.5,-35.6 -0.8,-35.6 -0.5,-35.9 0.049,-35.9 0.398,-35.55 0.74,-35.55 3.175,-33.115 3.175,-30.465 1.975,-29.265 1.975,-26.1 U13.7@1.75,-25.875
NetU13_9: U13.9 U14.14 | length 55.1
  Top Layer w0.2: U14.14@-36.75,-10.925 -36.575,-11.1 -33.8,-11.1 v1(-33.9,-11.2) ; v1(-24.1,-16.6) -24.1,-17.549 -22.649,-19 -19.654,-19 -18.8,-18.146 -18.8,-17.651 -18.448,-17.3 -17.951,-17.3 -17.676,-17.576 -16.765,-17.576 -15.489,-16.3 -13.221,-16.3 -11.225,-18.296 -11.225,-19.575 -10.1,-20.7 v1(-9.7,-20.7)
  Bottom Layer w0.2: v1(-33.9,-11.2) -33.8,-11.1 -31.9,-13 -27.646,-13 -24.1,-16.546 v1(-24.1,-16.6) ; v1(-9.7,-20.7) -9.7,-20.829 -9.054,-21.475 -7.873,-21.475 -0.173,-29.175 0.895,-29.175 2.25,-30.53 2.25,-32.8 2.4,-32.65 U13.9@2.4,-31.575
NetU13_14: U13.14 U17.9 | length 61.6
  Top Layer w0.2: v1(-16.8,-69.8) -16.7,-69.9 -12.2,-69.9 v1(-11.1,-71) ; v1(-16.7,-57.3) -16.7,-35.2 v1(-15.1,-33.6)
  Bottom Layer w0.2: v1(-16.8,-69.8) -16.8,-57.4 v1(-16.7,-57.3) ; v1(-15.1,-33.6) -15.1,-33.505 -14.445,-32.85 -13.399,-32.85 -13.224,-32.675 -3.23,-32.675 -2.88,-33.025 -1.674,-33.025 -0.85,-32.201 U13.14@-0.85,-31.575 ; v1(-11.1,-71) -9.6,-72.5 -9.25,-72.5 U17.9@-9.1,-72.35
NetU14_9: U14.9 U15.14 | length 60.7
  Top Layer w0.2: U14.9@-36.75,-7.675 -36.675,-7.6 v1(-34.7,-7.6)
  Bottom Layer w0.2: v1(-34.7,-7.6) -21.349,-7.6 -19.474,-9.475 -18.976,-9.475 -15.8,-6.299 -12.872,-6.299 -12.55,-6.621 -12.55,-6.734 -9.834,-9.45 -9.772,-9.45 -9.45,-9.772 -9.45,-10.228 -9.693,-10.471 -9.693,-11.042 -9.335,-11.4 -6.732,-11.4 -6.276,-11.855 -6.276,-11.94 -2.616,-15.6 -1.351,-15.6 -0.8,-15.048 -0.8,-14.948 -0.601,-14.75 1.545,-14.75 1.595,-14.8 5.372,-14.8 12.2,-7.972 U15.14@12.2,-6.625
NetU15_9: U15.9 U16.9 | length 28
  Top Layer w0.2: v1(15.45,-5) 18.8,-5 21.7,-7.9 v1(21.5,-8.1) ; v1(30.8,-7.5) 31.1,-7.8 32.001,-7.8 33,-8.799 33,-10.335 35.44,-12.775 U16.9@36.85,-12.775
  Bottom Layer w0.2: U15.9@15.45,-6.625 v1(15.45,-5) ; v1(21.5,-8.1) 30.2,-8.1 v1(30.8,-7.5)
NetU17_14: U17.14 U19.45 | length 62.5
  Top Layer w0.2: v1(-10.1,-66.1) -9.8,-65.8 -8.759,-65.8 -7.808,-64.85 -5.05,-64.85 v1(-4.4,-64.2) ; v1(10.2,-49.9) 10.2,-50.2 11.5,-50.2 12,-50.7 14.752,-50.7 14.951,-50.9 15.448,-50.9 15.8,-50.548 15.8,-50.051 15.3,-49.551 15.3,-48.148 17.35,-46.098 U19.45@17.35,-44.525
  Bottom Layer w0.2: v1(-10.1,-66.1) -10.55,-66.55 -10.55,-68.121 -10.25,-68.421 -10.25,-68.576 -9.726,-69.1 U17.14@-9.1,-69.1 ; v1(-4.4,-64.2) -5.049,-64.2 -5.8,-63.449 -5.8,-63.143 -6.5,-62.444 -6.5,-62.438 -8.45,-60.488 -8.45,-59.65 -8.4,-59.6 -8.4,-58.55 -8.45,-58.5 -8.45,-51.5 -1.6,-44.65 4.95,-44.65 v1(10.2,-49.9)
NetU19_36: U19.36 U23.2 X3.2 | length 50.9
  Top Layer w0.2: X3.2@9.35,-77.771 X3.2@9.35,-78.35 9.35,-77.55 v1(9.8,-77.1) 9.65,-76.95 U23.2@9.65,-76.186 ; v1(10.9,-46.8) 12.025,-45.675 12.516,-45.675 12.85,-45.341 U19.36@12.85,-44.525
  Bottom Layer w0.2: v1(9.8,-77.1) 9.25,-76.55 8.955,-76.55 8.905,-76.6 3.456,-76.6 1.65,-74.794 1.65,-73.445 -0.195,-71.6 -0.348,-71.6 -0.9,-71.048 -0.9,-69.751 -0.549,-69.4 0.549,-69.4 2.05,-67.899 2.05,-64.311 2.962,-63.4 3.055,-63.4 8.1,-58.355 8.1,-58.005 11.752,-54.353 11.752,-47.652 v1(10.9,-46.8)
NetU19_37: U19.37 U23.3 X3.3 | length 53.9
  Top Layer w0.2: X3.3@10,-77.771 X3.3@10,-78.35 10.2,-78.15 10.2,-77.571 v1@10.6,-77.171 ; U23.3@10.15,-76.186 10.209,-76.246 10.209,-76.616 v1@10.6,-77.006 ; v1(10.395,-47.505) 10.5,-47.4 11.291,-47.4 13.35,-45.341 U19.37@13.35,-44.525
  Bottom Layer w0.2: v1(10.395,-47.505) 10.305,-47.595 11.402,-48.692 11.402,-54.208 7.75,-57.86 7.75,-58.21 2.91,-63.05 2.817,-63.05 1.7,-64.166 1.7,-67.754 0.504,-68.95 -0.594,-68.95 -1.25,-69.606 -1.25,-71.193 -0.493,-71.95 -0.34,-71.95 1.3,-73.59 1.3,-74.938 3.362,-77 9.2,-77 9.2,-77.348 9.551,-77.7 10.049,-77.7 10.649,-77.1 v1(10.7,-77.1) v1@10.9,-77.1
NetU19_62: U19.62 U24.3 | length 24.8
  Top Layer w0.2: U19.62@20.65,-36.225 20.75,-36.125 22.082,-36.125 22.106,-36.15 22.45,-36.15 v1(22.8,-36.5) ; v1(25.9,-51.6) 25.9,-50.525 U24.3@25.95,-50.475
  Bottom Layer w0.2: v1(22.8,-36.5) 22.8,-36.15 22.825,-36.175 22.825,-36.768 25.156,-39.1 28.138,-39.1 28.9,-39.861 28.9,-48.6 v1(25.9,-51.6)
NetU21_3: U21.3 U23.6 | length 14.3
  Top Layer w0.2: U23.6@9.15,-75.436 9.15,-75.173 9.746,-74.576 10.549,-74.576 11.522,-75.55 11.728,-75.55 ; 11.743,-75.565 14.389,-75.565 14.832,-75.121 v1(14.832,-73.875) ; U21.3@12.825,-69.675 12.9,-69.6 v1(14.6,-69.6)
  Bottom Layer w0.2: v1@14.5,-69.7 v1(14.6,-69.6) 14.832,-69.832 v1(14.832,-73.875)
V5V: C40.1 C46.1 D31.2 D32.2 J1.3 R139.2 R140.2 U21.9 U21.18 U21.19 U23.1 X3.1 | length 77.4
  Top Layer w0.3: D31.2@4.9,-82 5,-82.1 14.45,-82.1 D32.2@14.65,-81.9 ; C40.1@6.4,-45.4 7.7,-45.4 J1.3@7.775,-45.475 7.775,-50.036 9.2,-51.461 9.2,-51.814 9.786,-52.4 10.899,-52.4 13.725,-55.226 13.725,-57.974 13.075,-58.624 13.075,-60.374 14,-61.299 v1(14,-61.9) ; 8.75,-77.359 9.15,-76.959 U23.1@9.15,-76.186 ; U21.9@10.325,-67.675 10.325,-65.275 v1(11.6,-64) ; 10.85,-73.45 10.925,-73.45 R140.2@11.85,-74.375
  Top Layer w0.5: D31.2@4.9,-82 6.05,-80.85 6.05,-80.059 7.8,-78.309 C46.1@7.8,-77.575 7.925,-77.575 X3.1@8.7,-78.35 8.75,-78.3 8.75,-77.359 8.9,-77.209
  Top Layer w1: C46.1@7.8,-77.575 8.35,-77.025 8.35,-74.907 8.792,-74.465 ; v1(8.942,-74.12) 9.236,-73.826 10.474,-73.826 10.85,-73.45 11.25,-73.05 R139.2@11.25,-72.75 ; R139.2@11.075,-72.296 11.225,-72.446 R139.2@11.225,-73.05
  Bottom Layer w0.3: v1(8.942,-74.12) 7.258,-74.12 6.838,-73.7 3.231,-73.7 2.925,-73.394 2.925,-69.545 3.5,-68.97 3.5,-66.751 4.151,-66.1 v1(10.3,-66.1) ; v1(11.6,-64) 11.6,-63.981 12.531,-63.05 12.85,-63.05 v1(14,-61.9)
VA: C1.1 C2.1 C6.1 C10.1 C11.1 C12.1 C13.1 C14.1 C23.1 C24.1 C50.1 C55.1 C63.1 C65.1 C67.1 J2.1 R105.2 R123.2 R124.2 R126.2 R128.2 S1.4 U1.3 U2.4 U3.4 U4.4 U5.4 U6.4 U7.4 U8.4 U9.4 U10.4 U11.4 U12.4 U24.5 | length 352.8
  Top Layer w0.2: U1.3@29.65,-41.325 29.65,-42.625 C1.1@29.725,-42.7
  Top Layer w0.5: C11.1@-44.75,-3.25 -44.75,-0.884 U6.4@-45.263,-0.37 -41.831,-0.37 -41.511,-0.05 -40.967,-0.05 -40.111,0.807 -40.111,2.869 -32.88,10.1 C13.1@-28.45,10.1 -26.519,12.031 U7.4@-25.225,12.031 -24.194,11 -20.341,11 v2(-20.23,11.111) -17.525,13.816 -17.525,14.141 -17.116,14.55 -15.884,14.55 -15.65,14.784 -15.65,14.824 -13.65,16.825 U3.4@-13.65,18.034 -7.816,12.2 C6.1@-2.1,12.2 -2.15,12.25 U8.4@-2.15,16.689 ; U11.4@-28.571,-76.35 -28.571,-72.896 C24.1@-28.45,-72.775 -25.775,-72.775 -24.6,-71.6 -19.177,-71.6 -18.802,-71.975 -17.81,-71.975 -17.25,-71.415 -17.25,-71.15 -16.7,-70.6 v1(-16.7,-70.7) ; v2(-20.23,8.37) -20.23,5.73 v2(-15.5,1) ; v1(-12.3,-59.1) -12.3,-58.28 -12.175,-58.155 J2.1@-12.175,-57 ; v1(-10.8,-76.3) -9.8,-76.3 ; S1.4@-10,-78 -9.8,-77.8 -9.8,-76.3 -9.7,-76.3 ; -9.7,-76.3 -9.8,-76.3 ; U8.4@-2.15,16.85 U8.4@-2.15,16.689 ; v1(2.9,-74.7) 4.49,-74.7 4.9,-75.11 4.9,-75.69 4.19,-76.4 -6.28,-76.4 -6.43,-76.25 -8.089,-76.25 -8.589,-75.75 -9.25,-75.75 -9.8,-76.3 ; v1(19.5,-69.8) 21,-69.8 21.65,-69.15 25.711,-69.15 26.15,-69.589 26.15,-69.816 27.434,-71.1 30.8,-71.1 30.85,-71.05 ; U5.4@27.375,-26.9 v1(29.6,-26.9) ; U24.5@28.65,-48.575 28.825,-48.4 C50.1@30.3,-48.4 31.2,-48.4 v2(31.3,-48.3) ; C67.1@30.1,-31.15 30.1,-32.5 31.8,-34.2 31.8,-41.224 30.324,-42.7 C1.1@29.725,-42.7 C2.1@29.725,-44.1 v2(30.6,-44.975) ; v2@30.1,-29.6 v2(30.1,-29.634) v2@30.175,-29.709 ; C67.1@30.175,-31.15 v2@30.175,-29.709 ; v2@30.192,-29.692 v2@30.175,-29.709 ; v2(30.85,-51.45) 30.85,-71.05 ; U12.4@32.752,-76.35 32.65,-76.248 C23.1@32.65,-72.575 32.375,-72.575 30.85,-71.05 ; v1(35.1,-29.4) 35.7,-28.8 R128.2@35.7,-28.575 ; v1(41.3,-29.5) 41.4,-29.5 41.95,-30.05 R126.2@42.6,-30.05 ; R126.2@42.55,-30.1 R126.2@42.6,-30.05 ; v2(46.4,-3.8) 46.4,-3.75 46.125,-3.475 44.887,-3.475 42.058,-0.645 U10.4@42.058,2.32 41.288,1.55 C10.1@39.3,1.55 35.825,5.025 35.825,7.335 33.428,9.732 24.212,9.732 23.794,10.15 C12.1@22.175,10.15 22.175,12.565 U9.4@21.269,13.472 19.24,15.5 U2.4@13.251,15.5 10.257,15.5 9.208,14.45 -0.818,14.45 -1.55,15.182 -1.55,16.089 U8.4@-2.15,16.689 ; v2(47.85,-9.05) C65.1@47.85,-23.65 47.85,-27.666 44.616,-30.9 43.584,-30.9 42.734,-30.05 R126.2@42.6,-30.05
  Bottom Layer w0.5: v2(-20.23,8.37) v2(-20.23,11.111) ; v1(-16.7,-70.7) -16.7,-70.6 -13.8,-70.6 ; U4.4@-16.151,-2.925 -15.313,-2.925 -14.175,-1.787 C14.1@-14.175,0.925 -14.25,1 v2(-15.5,1) ; v1(-12.3,-59.1) -13.8,-60.6 -13.8,-70.6 ; R123.2@-10.2,-77.1 C55.1@-10.2,-75.55 C63.1@-10.2,-74.2 ; R124.2@-8.825,-74.15 -9.6,-74.15 ; R124.2@-8.825,-74.1 -9.55,-74.1 -9.6,-74.15 ; v1(2.9,-74.7) 5.539,-74.7 5.989,-74.25 6.611,-74.25 7.231,-74.87 9.253,-74.87 9.373,-74.75 12.059,-74.75 13.409,-76.1 15.6,-76.1 15.6,-73.7 15.582,-73.682 15.582,-73.564 15.5,-73.482 15.5,-71.42 16.72,-70.2 19.1,-70.2 v1(19.5,-69.8) ; v1(29.6,-26.9) 30.2,-27.5 v2@30.2,-29.5 ; v2(30.1,-29.634) 30.334,-29.4 v1(35.1,-29.4) 41.2,-29.4 v1(41.3,-29.5) ; v2(30.6,-44.975) 30.6,-47.6 v2(31.3,-48.3) 31.3,-51 v2(30.85,-51.45) ; v2(46.4,-3.8) 46.125,-4.075 46.125,-6.991 47.025,-7.891 R105.2@47.025,-8.075 47.025,-8.225 v2(47.85,-9.05) ; -13.8,-70.6 C63.1@-10.2,-74.2 ; C63.1@-10.2,-74.2 -10.15,-74.15 -9.6,-74.15
VBAT: C5.1 C7.1 C8.1 C9.1 C22.1 C25.1 C31.1 C44.1 C47.1 C49.1 C51.1 C52.1 D2.4 D2.5 D2.6 D6.4 D6.5 D6.6 D27.4 D27.5 D27.6 D37.2 J2.3 R111.2 R112.2 R113.2 R114.2 T1.2 T2.2 T3.2 T4.2 U2.2 U3.2 U6.2 U7.2 U8.2 U9.2 U10.2 U11.2 U12.2 U18.1 U18.3 U21.1 U21.20 U22.1 U22.3 U24.1 | length 531.3
  Top Layer w0.3: D37.2@-52.45,-25.925 -52.45,-25.351 -51.599,-24.5 v1(-49.1,-24.5)
  Top Layer w0.4: U21.20@11.825,-71.675 C44.1@13.125,-71.675 ; U21.1@12.825,-70.675 12.825,-71.375 C44.1@13.125,-71.675 ; C44.1@13.225,-71.775 C44.1@13.125,-71.675
  Top Layer w0.5: J2.3@-13.775,-57 -13.675,-56.9 -13.675,-55.111 -9.664,-51.1 -9.644,-51.1 -9,-50.456 -9,-50.436 -4.901,-46.337 -1.324,-46.337 -1.311,-46.35 -0.689,-46.35 -0.676,-46.337 2.863,-46.337 2.906,-46.38 ; 10.075,-57.6 10.125,-57.55 U22.3@12.9,-57.55
  Top Layer w1: v1(-27.2,-30) v2(-25.881,-30) -24.375,-31.506 ; U18.1@-21.375,-30.85 -21.6,-30.625 C31.1@-23.275,-30.625 -23.494,-30.625 -24.375,-31.506 ; v2(-14.1,-31.3) -13.9,-31.3 -13.7,-31.1 ; v1(-13.7,-28.8) v1(-13.7,-29.9) -13.7,-31.1 ; D27.6@1.85,-37.85 D27.6@2.3,-37.85 ; U22.1@12.9,-55.65 12.475,-55.225 C47.1@11.175,-55.225 ; C44.1@13.225,-71.775 13.225,-71.994 14.106,-72.875 16.361,-72.875 16.486,-73 17.314,-73 17.9,-72.414 v1(17.9,-71.6) 17.9,-67.181 ; U24.1@25.95,-48.575 23.956,-48.575 23.275,-49.256 23.275,-63.911 20.005,-67.181 17.9,-67.181 ; -24.375,-31.506 -24.375,-32.744 -23.994,-33.125 -22.052,-33.125 -21.677,-32.75 U18.3@-21.375,-32.75 -20.419,-32.75 -19.469,-33.7 -17.156,-33.7 -15.731,-32.275 -13.7,-32.275 ; -13.7,-32.275 -13.536,-32.275 -13.186,-31.925 -3.625,-31.925 -2.15,-33.4 0.463,-33.4 1.05,-33.987 1.05,-34.164 1.05,-34.641 1.15,-34.741 1.15,-35.859 1.05,-35.959 1.05,-36.6 D27.6@2.3,-37.85 ; -13.7,-32.275 -13.7,-31.1 ; D27.6@2.3,-37.85 D27.5@2.3,-39.6 D27.4@2.3,-41.35 2.3,-45.774 2.863,-46.337 8.15,-51.624 8.15,-52.2 C47.1@11.175,-55.225 ; C47.1@11.175,-55.225 10.956,-55.225 10.075,-56.106 10.075,-57.6 10.075,-59.389 13.586,-62.9 13.619,-62.9 17.9,-67.181
  Bottom Layer w0.3: v1(-49.1,-24.5) -47.35,-22.75 D2.4@-43.3,-22.75
  Bottom Layer w0.5: U11.2@-32.671,-76.35 -32.671,-72.754 C25.1@-32.675,-72.75 -32.675,-72.616 -31.825,-71.766 -31.825,-36.811 -32.526,-36.111 -32.526,-30.726 -31.8,-30 ; v1(17.9,-71.6) 22.823,-71.6 24.973,-73.75 C22.1@27.175,-73.75 28.652,-75.227 U12.2@28.652,-76.35 U12.2@28.601,-76.4
  Bottom Layer w1: v2(-25.881,-30) v1(-27.2,-30) -31.8,-30 -36.05,-30 D2.4@-43.3,-22.75 D2.5@-43.3,-21 D2.6@-43.3,-19.25 -43.3,-17.876 -37.35,-11.926 -37.35,-8.074 -37.8,-7.624 -37.8,-2.058 U6.2@-42.123,2.265 -39.31,2.265 C9.1@-38.575,3 -38.575,3.219 -37.194,4.6 -31.114,4.6 -29.614,3.1 -23.386,3.1 -20.9,5.586 -20.9,6.414 -21.6,7.114 -21.6,13.206 U7.2@-21.373,13.434 -19.663,13.434 -19.209,12.98 -16.451,12.98 -15.256,14.175 -15.256,18.478 -14.179,19.554 -10.771,19.554 -10.201,20.125 -8.999,20.125 -8.1,19.226 -8.1,17.269 U3.2@-9.203,16.166 -9.203,15.028 C5.1@-7.9,13.725 ; C51.1@-17.35,-14 -17.35,-14.801 -16.95,-15.201 -16.95,-15.575 T2.2@-16.8,-15.725 ; v2(-14.1,-31.3) -14,-31.4 -13.7,-31.1 v1(-13.7,-29.9) v1(-13.7,-28.8) -13.7,-27.194 -20.15,-20.744 -20.15,-17.031 -20.027,-16.908 -19.5,-16.381 -19.5,-15.85 -18.025,-14.375 -18.025,-12.656 -15.594,-10.225 -15.139,-10.225 -15.1,-10.186 -15.1,-9.986 -14.514,-9.4 -13.686,-9.4 -11.286,-11.8 -10.986,-11.8 -10.4,-12.386 -10.4,-12.399 -9.493,-13.306 -7.3,-13.306 ; T1.2@-7.475,-15.625 -7.3,-15.45 -7.3,-13.306 ; U8.2@1.95,16.85 1.95,16.35 2.05,16.25 2.636,16.25 2.886,16.5 3.714,16.5 4.3,15.914 4.3,15.086 4.05,14.836 4.05,14.25 4.534,13.766 ; C7.1@4.65,15.9 4.534,15.784 4.534,13.766 ; U2.2@9.599,18.65 9.599,18.589 7.752,16.742 7.752,15.782 6.769,14.8 6.769,13.319 5.875,12.425 ; T3.2@11.325,-14.725 12.194,-14.725 12.675,-14.244 12.675,-12.806 12.294,-12.425 ; T4.2@18.6,-14.875 18.6,-13.9 R112.2@18.875,-13.625 18.85,-13.6 C52.1@18.85,-12.125 18.35,-11.625 18.35,-11.025 ; U9.2@25.122,12.069 22.525,9.473 22.525,7.106 19.744,4.325 18.2,4.325 ; D6.6@43.3,-22.75 D6.5@43.3,-21 D6.4@43.3,-19.25 39.35,-15.3 ; 45.198,-3.052 U10.2@45.198,-0.316 46.453,-0.316 50.3,-4.163 50.3,-4.214 50.886,-4.8 50.937,-4.8 51.7,-5.563 51.7,-11.637 48.037,-15.3 39.35,-15.3 ; -7.3,-13.306 -6.961,-13.306 -3.217,-17.05 5.506,-17.05 9.031,-13.525 R114.2@10.175,-13.525 10.175,-13.306 11.056,-12.425 12.294,-12.425 ; 4.534,13.766 5.875,12.425 ; 5.875,12.425 5.935,12.365 5.935,11.221 5.875,11.161 5.875,6.231 7.781,4.325 18.2,4.325 ; 12.294,-12.425 12.306,-12.425 14.131,-10.6 16.114,-10.6 16.539,-11.025 18.35,-11.025 ; 18.2,4.325 18.35,4.175 18.35,-11.025 ; 18.35,-11.025 19.825,-11.025 24.1,-15.3 39.35,-15.3
VCC: C3.1 C4.1 C26.1 C28.1 C30.1 C35.1 C36.1 C37.1 C38.1 C39.1 C48.1 C68.1 C69.1 C70.1 C71.1 D9.2 D10.2 D11.2 D12.2 D25.2 D26.2 D33.2 D34.2 R101.2 R103.2 R104.2 U1.9 U13.10 U13.16 U15.10 U15.16 U17.10 U17.16 U19.10 U19.19 U19.26 U19.35 U19.38 U19.57 U22.5 X1.2 | length 463.9
  Top Layer w0.3: C35.1@6.975,-35.6 7.55,-36.175 9.5,-36.175 U19.19@9.55,-36.225 12.436,-36.225 ; C39.1@7,-40.2 7.7,-40.2 8.125,-39.775 10.486,-39.775 12.664,-41.952 ; U19.35@12.35,-44.525 12.4,-44.475 12.4,-43.589 12.664,-43.325 ; C36.1@13.825,-46.175 13.85,-46.15 U19.38@13.85,-44.525 13.8,-44.475 13.8,-43.589 13.536,-43.325 12.664,-43.325 ; 14.336,-32.411 14.35,-32.425 U19.10@14.35,-33.425 14.3,-33.475 14.3,-34.361 12.436,-36.225 ; C37.1@22.675,-38 21.95,-38.725 U19.57@20.65,-38.725 19.694,-38.725 19.117,-39.302 18.081,-39.302 18.029,-39.25 17.231,-39.25 17.031,-39.05 16.369,-39.05 ; U1.9@29.15,-38.325 29.15,-36.776 29.15,-36.55 C3.1@29.175,-36.525 ; 12.436,-36.225 13.261,-37.05 15.531,-37.05 15.731,-36.85 16.269,-36.85 16.764,-37.345 16.764,-38.655 16.369,-39.05 ; 12.664,-43.325 12.664,-41.952 ; 12.664,-41.952 12.664,-40.717 14.656,-38.725 ; 14.656,-38.725 14.681,-38.7 15.481,-38.7 15.831,-39.05 ; 14.656,-38.725 14.981,-39.05 15.831,-39.05 ; 15.831,-39.05 16.369,-39.05
  Top Layer w0.5: v1(-45,-14.6) -44.9,-14.5 v1(-37.6,-14.5) ; v1(-35.5,2.9) -35,3.4 v1(-35,6) ; v1(-31.634,2.8) -23.3,-5.534 -23.3,-7 -19.8,-10.5 -14,-10.5 v1(-14.1,-10.4) ; v1(-11.4,-12.8) -11.4,-13.1 -11.267,-13.233 -3.112,-13.233 -2.349,-12.47 X1.2@-1.805,-12.47 ; D33.2@-9.175,-24 v1(-9.175,-22.775) ; v1(-7.1,-65.8) -2.961,-65.8 -0.361,-68.4 1.761,-68.4 2.2,-67.961 2.2,-66.693 3.443,-65.45 3.811,-65.45 4.25,-65.011 4.25,-64.643 6.543,-62.35 11.711,-62.35 12.15,-62.789 12.15,-63.089 12.661,-63.6 12.9,-63.6 v1(12.8,-63.7) ; D34.2@10.15,-21.5 10.2,-21.55 10.2,-23.761 10.15,-23.811 10.15,-27.311 11.418,-28.579 13.894,-28.579 ; C36.1@13.809,-46.175 C36.1@13.825,-46.175 13.825,-48.286 14.316,-48.776 14.316,-49.416 v1(15.2,-50.3) ; 14.35,-32.397 14.35,-31.95 C38.1@14.025,-31.625 13.894,-31.494 13.894,-28.579 ; U22.5@15.6,-55.65 15.675,-55.725 C48.1@17.15,-55.725 ; v1(16.261,-63.461) 18,-63.461 ; v1(16.6,-48.776) 17.15,-48.776 ; v1(19.9,-7.9) 16.2,-7.9 v1(15.6,-8.5) 15.6,-12.126 15.376,-12.35 15.376,-14.035 18.3,-16.959 18.3,-22.057 18.993,-22.75 19.111,-22.75 19.55,-23.189 19.55,-23.811 19,-24.361 R103.2@19,-28.975 ; v1(20.261,-63.461) 18,-63.461 ; 20.489,-28.45 19.525,-28.45 R103.2@19,-28.975 ; 20.589,-28.55 21.311,-28.55 22.175,-29.414 22.175,-30.902 22.95,-31.677 ; 21.851,-44.075 19.626,-46.3 19.32,-46.3 17.45,-48.17 17.45,-48.476 17.15,-48.776 ; 22.012,-44.075 25.95,-40.137 ; 23.111,-31.85 26.413,-35.152 26.413,-36.553 ; v1(24.4,-80.9) 25.85,-79.45 v1(25.85,-76.55) 25.4,-76.1 v1(25.4,-69.9) ; 25.95,-39.999 26.413,-39.536 ; 26.55,-36.689 26.55,-36.766 27.159,-37.375 28.551,-37.375 29.15,-36.776 29.175,-36.751 C3.1@29.175,-36.525 C4.1@29.175,-35.325 ; v1(37.6,-4.5) 42.6,-4.5 v1(43.1,-5) ; v1(45.2,-5.9) 45.142,-5.958 45.1,-5.958 45.1,-5.9 46.5,-4.5 46.69,-4.5 47.35,-3.84 47.35,-3.589 47.789,-3.15 47.85,-3.15 50.828,-0.172 v1(50.828,0.1) ; 13.894,-28.579 14.129,-28.344 16.894,-28.344 17.525,-28.975 R104.2@17.8,-28.975 R103.2@19,-28.975 ; C48.1@17.15,-55.725 18,-56.575 18,-63.461 ; C48.1@17.15,-55.725 17.15,-48.776
  Bottom Layer w0.5: D9.2@-52.172,-0.172 -52.172,-7.428 v1(-45,-14.6) ; v1(-37.6,-14.5) -37.6,-13.449 -36.45,-12.299 -36.45,1.95 v1@-35.6,2.8 ; v1(-35.5,2.9) v1@-35.6,2.8 ; v1(-35,6) -35,11.26 D10.2@-31.761,14.499 ; v1(-31.634,2.8) v1@-35.6,2.8 ; D25.2@-23.35,-81.9 -20.1,-81.9 C69.1@-19.887,-81.687 ; C69.1@-19.775,-81.8 -19.641,-81.8 -17.441,-79.6 -11.761,-79.6 -11.611,-79.75 -10.989,-79.75 -9.1,-77.861 -9.1,-77.761 -7.4,-76.061 -7.4,-73.714 -7.85,-73.264 -7.85,-71.288 ; v1(-14.1,-10.4) v1@-11.7,-12.8 ; v1(-11.4,-12.8) v1@-11.7,-12.8 ; -8.187,-71.625 -7.85,-71.288 ; v1(-7.1,-65.8) -7.075,-65.825 -7.075,-66.65 -7.95,-66.65 U17.16@-9.1,-67.8 -9.025,-67.875 -8.187,-67.875 -6.95,-69.112 -6.95,-70.611 -7.389,-71.05 -7.772,-71.05 -7.85,-71.128 -7.85,-71.288 ; U13.16@-2.15,-31.575 -2.325,-31.4 C26.1@-3.575,-31.4 -3.575,-31.291 -4.425,-30.441 -4.425,-27.9 ; X1.2@-1.805,-12.47 -1.569,-12.47 -0.15,-13.889 -0.15,-14.125 3.554,-14.125 4.31,-13.369 4.31,-9.34 6.45,-7.2 6.839,-7.2 7.089,-7.45 7.711,-7.45 8.15,-7.011 8.15,-6.389 7.9,-6.139 7.9,-5.75 C28.1@9.225,-4.425 U15.16@10.9,-6.1 ; U13.10@1.75,-31.575 1.75,-30.737 0.688,-29.675 -0.381,-29.675 -2.156,-27.9 -4.425,-27.9 ; U15.16@10.9,-6.625 U15.16@10.9,-6.1 ; v1(12.8,-63.7) 12.9,-63.6 16.121,-63.6 v1(16.261,-63.461) ; v1(15.2,-50.3) 15.2,-50.176 v1(16.6,-48.776) ; v1(15.6,-8.5) 15.6,-8.439 14.8,-7.639 U15.10@14.8,-6.625 14.725,-6.55 14.725,-5.712 14.25,-5.237 14.25,-4.989 13.711,-4.45 12.089,-4.45 10.9,-5.639 U15.16@10.9,-6.1 ; v1(19.9,-7.9) 19.9,-5.061 20.154,-5.061 20.154,-3.293 19.9,-3.039 19.9,3.162 21.038,4.3 27.1,4.3 ; v1(20.261,-63.461) 25.4,-68.6 v1(25.4,-69.9) ; v1(24.4,-80.9) 24.5,-80.9 D26.2@25.5,-81.9 ; C68.1@25.65,-77.7 25.65,-76.75 v1(25.85,-76.55) ; 30.1,14.5 29.7,14.9 29.7,12.9 29.284,12.484 29.284,6.584 29.334,6.534 27.1,4.3 ; v1(37.6,-4.5) 37.1,-4 35.4,-4 27.1,4.3 ; v1(43.1,-5) 43.223,-5 43.998,-5.775 45.075,-5.775 v1(45.2,-5.9) ; C71.1@50.3,-0.775 50.828,-0.247 v1(50.828,0.1) ; v1@50.828,-0.172 v1(50.828,0.1) ; D12.2@50.828,1.272 v1(50.828,0.1) ; v1@-11.7,-12.8 -11.7,-20.25 v1(-9.175,-22.775) -6.8,-25.15 -5.689,-25.15 -4.25,-26.589 -4.25,-27.725 -4.425,-27.9
VLED: C27.1 C29.1 C32.1 D1.2 D3.2 D4.2 D5.2 D13.2 D14.2 D15.2 D16.2 U14.10 U14.16 U16.10 U16.16 U18.5 | length 214.5
  Top Layer w0.2: U14.10@-36.75,-8.325 -36.124,-8.325 -35.1,-9.349 -35,-9.249 v1(-35,-9.1) ; C27.1@-36.325,-13.975 -36.75,-13.55 U14.16@-36.75,-12.225 -35.125,-12.225 v1(-35.1,-12.2) ; v1(35.4,-8.6) 35.775,-8.225 U16.16@36.85,-8.225
  Top Layer w0.5: C27.1@-36.325,-13.975 -36.15,-14.15 -36.15,-14.511 -35.486,-15.175 -35.125,-15.175 -34.35,-15.95 ; C32.1@-17,-30.325 -17.525,-30.85 U18.5@-18.675,-30.85 -23.225,-26.3 -24.1,-26.3 -33.5,-16.9 -33.5,-16.8 -34.35,-15.95 ; D4.2@-9,-6.2 -12.55,-9.75 ; -0.8,-15.161 D3.2@-0.8,-16 -0.8,-14.739 -1.2,-14.339 -1.2,-14.25 -2.22,-14.25 -2.553,-14.583 -11.826,-14.583 -12.159,-14.25 -13.412,-14.25 -13.631,-14.469 -14.71,-13.39 -14.71,-13.29 ; D13.2@0,16.4 0,15.6 v1(0.325,15.275) ; v1(0.2,5.8) 1.6,4.4 ; v1(13.9,-14.9) 13.9,-14.8 13.1,-14 13.1,-12.009 13.65,-11.459 13.65,-9.789 13.211,-9.35 12.15,-9.35 D5.2@9,-6.2 4.15,-1.35 1.389,-1.35 0.579,-2.161 -0.8,-2.161 ; v1(14.5,-22.1) 14.5,-22.656 D16.2@16.534,-24.691 ; v1(16.5,-12.9) 16.55,-12.85 19.811,-12.85 23.004,-9.656 23.004,-8.665 22.95,-8.611 22.95,-6.989 23.389,-6.55 23.85,-6.55 D15.2@24.2,-6.2 v1(23.4,-5.4) ; D14.2@16.546,10.678 16.019,11.205 14.389,11.205 13.884,10.7 7.9,10.7 1.6,4.4 ; v1(28,-5.3) 28,-5.4 28.075,-5.475 35.766,-5.475 36.741,-6.45 C29.1@36.875,-6.45 36.85,-6.475 U16.16@36.85,-8.225 ; v1(35.4,-11.887) 35.563,-12.05 36.775,-12.05 U16.10@36.85,-12.125 ; -34.35,-15.95 -29.457,-15.95 -29.107,-15.6 -28.693,-15.6 -28.343,-15.95 -26.911,-15.95 -25.061,-14.1 -23.944,-14.1 -22.094,-15.95 -19.291,-15.95 -19.091,-15.75 -17.169,-15.75 -16.35,-14.931 -16.35,-14.689 -15.911,-14.25 -15.669,-14.25 -14.71,-13.29 ; -14.71,-13.29 -13.75,-12.331 -13.75,-12.289 -13.311,-11.85 -13.296,-11.85 -12.446,-11 -12.419,-11 -12.375,-10.956 -12.375,-9.925 -12.55,-9.75 ; -12.55,-9.75 -11.235,-9.75 -10.285,-8.8 -6.944,-8.8 -5.694,-7.55 -5.341,-7.55 -4.901,-7.111 -4.901,-4.994 -2.068,-2.161 -0.8,-2.161 ; -0.8,-2.161 D1.2@-0.8,2 1.6,4.4
  Bottom Layer w0.2: v1(-35.1,-12.2) -35.1,-9.2 v1(-35,-9.1) ; v1(35.4,-11.887) v1(35.4,-8.6)
  Bottom Layer w0.5: v1(0.2,5.8) 0.35,5.95 0.35,15.25 v1(0.325,15.275) ; v1(14.5,-22.1) 14.5,-21.456 15.5,-20.456 15.5,-16.5 v1(13.9,-14.9) 14.2,-14.9 16.2,-12.9 v1(16.5,-12.9) ; v1(23.4,-5.4) 27.9,-5.4 v1(28,-5.3)
pads on no net: S1.1 S1.8 U1.0 U1.2 U16.14 U18.4 U21.6 U22.4 U24.4 X1. X1.6 X3.4 X3.S

## Polygon pours and split planes (outlines as drawn)
no net on Top Layer "Top Layer-No Net" (solid, remove dead copper, shelved, pour order 1001): -9.05,10 9.225,10 9.225,-8.2 -9.05,-8.2
GND on Bottom Layer "gnd_term" (solid, remove dead copper, pour order 1000): 6.2,-64.9 6.3,-65 18.2,-65 18.2,-75.25 16.75,-76.7 16.65,-76.8 2.8,-76.8 2.8,-68 5.8,-65
GND on Bottom Layer "gnd_bot" (solid, remove dead copper, pour order 1000): -61.1,23.4 67,23.4 69.3,21.1 60,11.8 60,-94.8 -59,-94.8 -61.8,-92
GND on Top Layer "gnd_top" (solid, remove dead copper, pour order 1001): -58.3,23.4 -56.6,25.1 65.6,25.1 65.6,-83 48.6,-100 41.3,-92.7 -62.6,-92.7

## Keep-outs
Keep-Out Layer:
  lines w0.1: -53.5,0 -50.816,2.669 -48.472,-0.125 -41.807,5.467 -44.152,8.261 -41.829,9.919 -39.444,11.487 -37,12.961 -34.501,14.34 -31.951,15.622 -29.353,16.805 -28.106,13.377 -19.931,16.353 -21.178,19.78 -18.428,20.544 -15.651,21.201 -12.85,21.751 -10.03,22.193 -7.195,22.525 -4.35,22.747 -4.35,19.1 4.35,19.1 4.35,22.747 7.195,22.525 10.03,22.193 12.85,21.751 15.651,21.201 18.428,20.544 21.178,19.78 19.931,16.353 28.106,13.377 29.353,16.805 31.951,15.622 34.501,14.34 37,12.961 39.444,11.487 41.829,9.919 44.152,8.261 41.807,5.467 48.472,-0.125 50.816,2.669 53.5,0 53.5,-33.068 35,-33.068 35,-78.6 26.3,-78.6 26.3,-83 -26.3,-83 -26.3,-78.6 -35,-78.6 -35,-33.068 ; -53.5,0.068 -53.5,-29 -51.5,-29 -51.5,-30 -53.5,-30 -53.5,-33 -51,-33 -51,-30.932 -50,-30.932 -50,-33 -35,-33

## Other copper
Top Layer:
  text ".ProjectName" at -53.375,-38.2 h2.5
  text "EPFL STI-IMT-LSRO1" at -52,-40.9 h1.4
  text "13.02.2008 - Rev 1.0 - DBR" at -54,-42.15 h1.4